# Altium PCB PCB_power.PcbDoc
Units mil, origin at the board's own origin, x right, y up, seen from the top; angles counter-clockwise.
Board outline 3346.46 x 2204.72 mil, 6 copper layers (Top Layer, Layer 1, Layer 2, Layer 3, Layer 4, Bottom Layer), stack 32.112 mil thick; 144 components, 95 nets, 574 pads, 278 vias.
Unrouted connection lines stored in the file: 260.
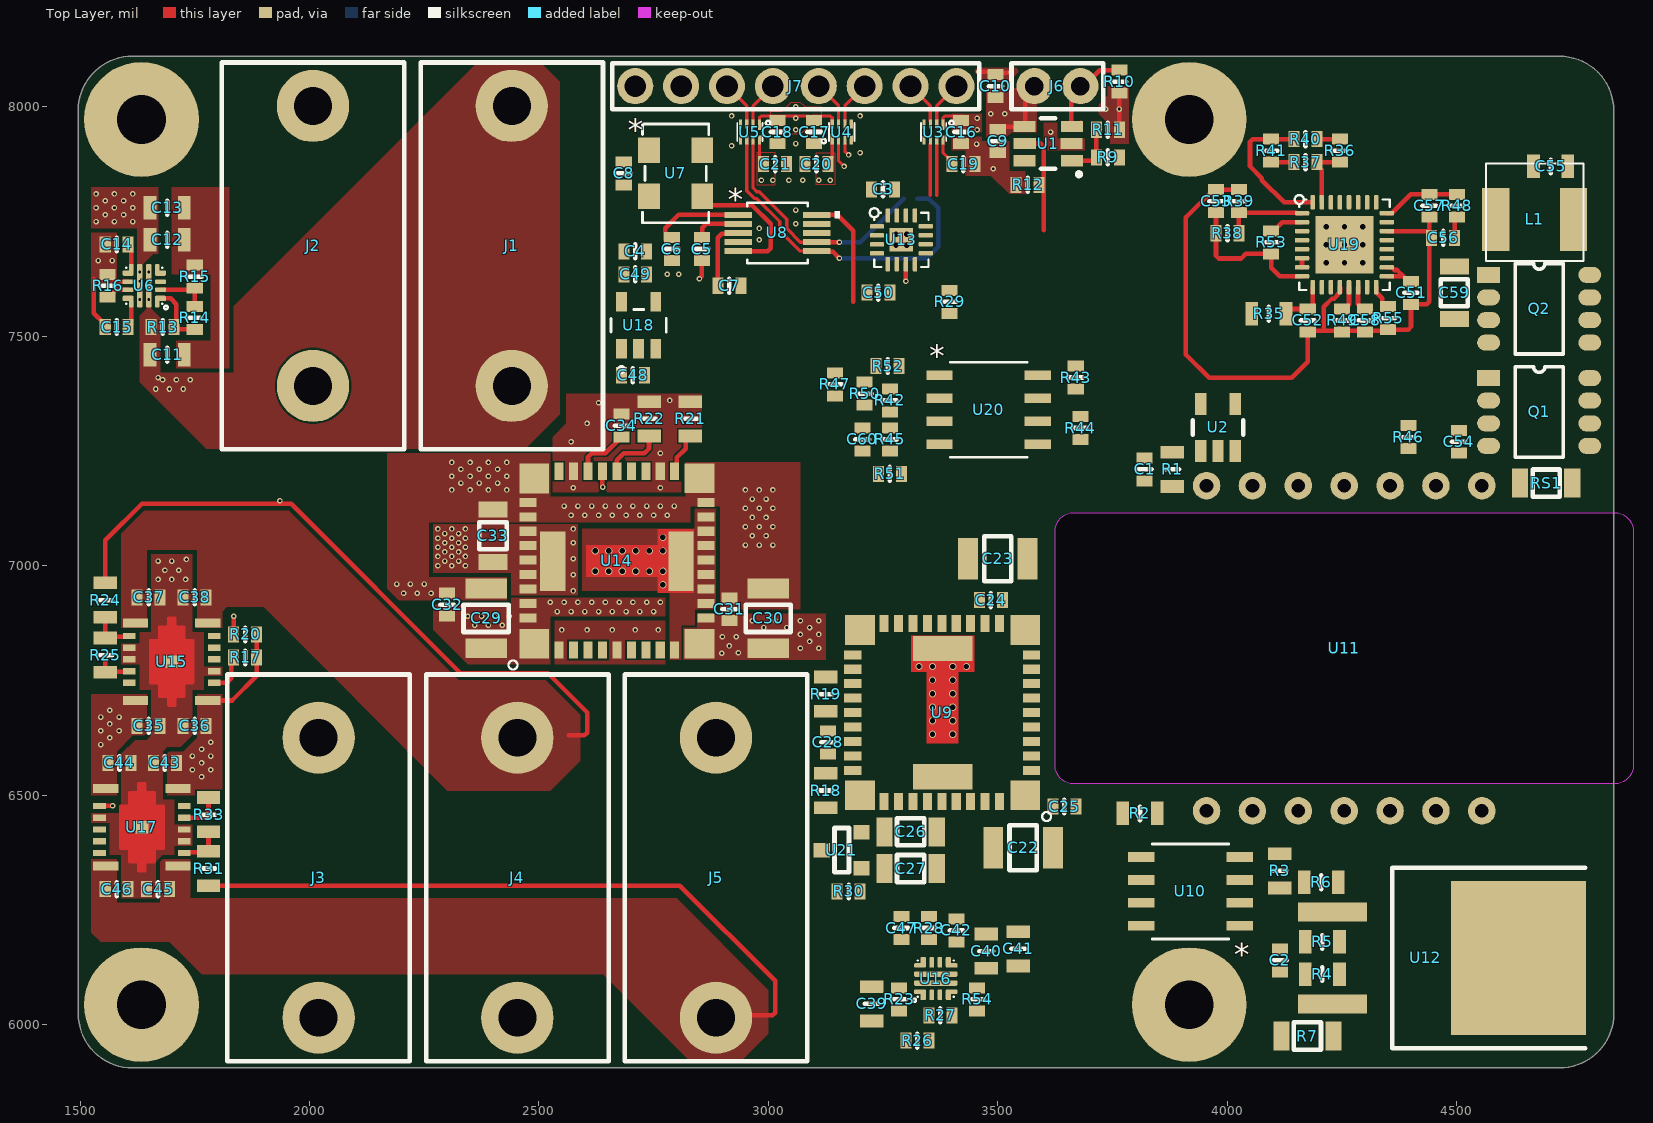
[diagram p0: Top Layer view]
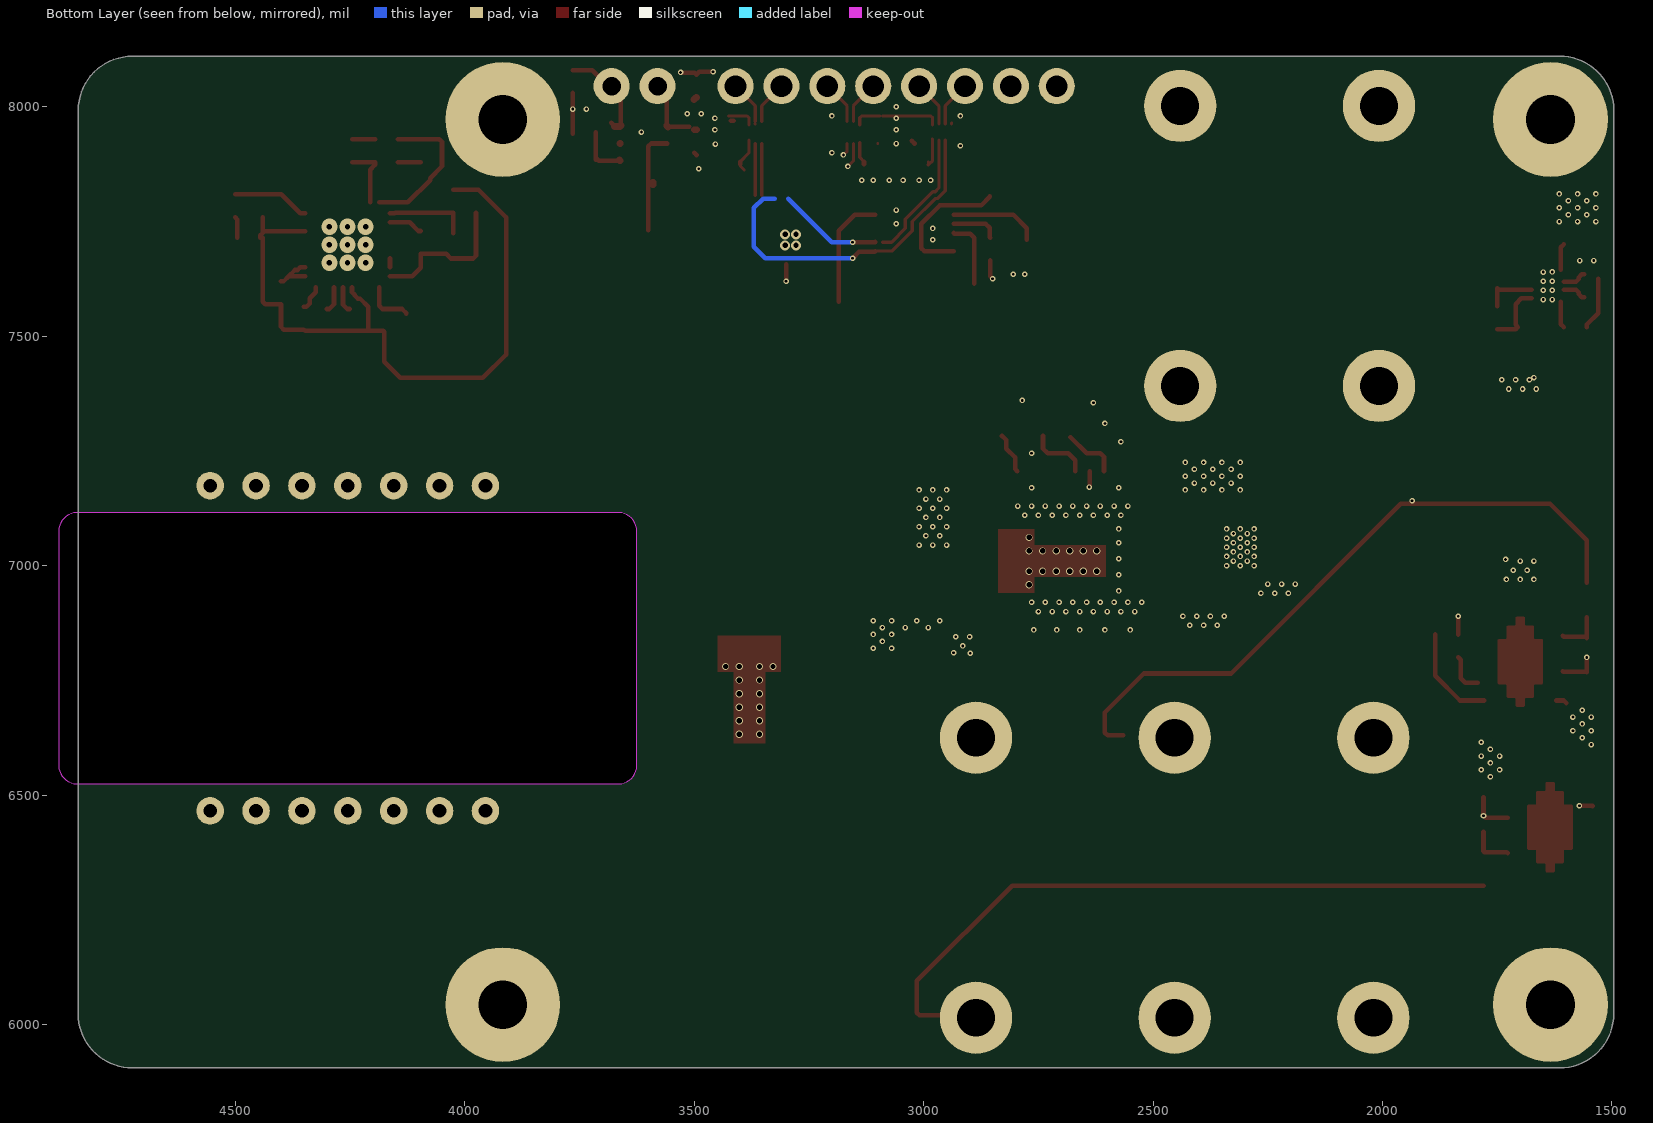
[diagram p1: Bottom Layer view, seen from below]

## Layer stack, top to bottom
Top Solder: solder mask 0.4, Solder Resist, Dk 3.5
Top Layer: signal copper 1.4
Dielectric 1: prepreg 2.8, PP-006, Dk 4.1
Layer 1: signal copper 1.378
Dielectric 2: prepreg 2.8, PP-006, Dk 4.1
Layer 2: signal copper 1.378
Dielectric 3: dielectric 12.6, FR-4, Dk 4.8
Layer 3: signal copper 1.378
Dielectric 4: prepreg 2.8, PP-006, Dk 4.1
Layer 4: signal copper 1.378
Dielectric 5: prepreg 2.8, PP-006, Dk 4.1
Bottom Layer: signal copper 1.4
Bottom Solder: solder mask 0.4, Solder Resist, Dk 3.5

## Board outline
1496.06,6023.62 1496.06,7992.13 cw(c1614.17,7992.13) 1614.17,8110.24 4724.41,8110.24 cw(c4724.41,7992.13) 4842.52,7992.13 4842.52,6023.62 cw(c4724.41,6023.62) 4724.41,5905.51 1614.17,5905.51 cw(c1614.17,6023.62)

## Design rules (kind name [scope] priority, off if disabled: settings)
Clearance [All] p1: gap=4 ignorepadtopadclearanceinfootprint=TRUE
HoleSize [All] p1: absolutevalues=TRUE maxlimit=100 minlimit=11.81 maxpercent=80.000 minpercent=20.000
PolygonConnect [All] p1: connectstyle=Direct reliefconductorwidth=10 reliefentries=4 polygonreliefangle="90 Angle" airgapwidth=10
RoutingVias [All] p1: holewidth=6 width=12 viastyle="Through Hole" minholewidth=6 minwidth=12 maxholewidth=50 maxwidth=100 viatemplateguid#1={191AAEB9-C5C8-47EE-9A1E-635FF2006958} viatemplatename#1=v61h30
SolderMaskExpansion [All] p1: expansion=4 istentingtop=FALSE
Width [All] p1: maxlimit=100 minlimit=4 preferedwidth=10
29 further rules are at their usual default settings.

## Classes and differential pairs
component class TECController: C51 C52 C53 C54 C55 C56 C57 C58 C59 C60 L1 Q1 Q2 R35 R36 R37 R38 R39 R40 R41 R42 R43 R44 R45 R46 R47 R48 R49 R50 R51 R52 R53 R55 RS1 U19 U20
component class Power: C11 C12 C13 C14 C15 C22 C23 C24 C25 C26 C27 C28 C29 C30 C31 C32 C33 C34 C35 C36 C37 C38 C39 C40 C41 C42 C43 C44 C45 C46 C47 C48 C49 R13 R14 R15 R16 R17 R18 R19 R20 R21 R22 R23 R24 R25 R26 R27 R28 R29 R30 R31 R33 R54 U6 U9 U14 U15 U16 U17 U18 U21
component class LaserDiode: C1 C2 R1 R2 R3 R4 R5 R6 R7 U2 U10 U11 U12
component class Control: C3 C4 C5 C6 C7 C8 C50 U7 U8 U13
component class Connectors: C9 C10 C16 C17 C18 C19 C20 C21 J1 J2 J3 J4 J5 J6 J7 R9 R10 R11 R12 U1 U3 U4 U5

## Components (designator, comment, footprint, x,y, rotation, side; value= is the part's Value field where it differs from the comment)
C1 "120pF" "0603 B" 3820,7210 r270 top
C2 "47pF" "0603 B" 4115,6140 r90 top
C3 "0.1uF" "0603 B" 3250,7820 r180 top
C4 "10uF" "0603 B" 2710,7685 r180 top
C5 "0.1uF" "0603 B" 2855,7690 r90 top
C6 "0.01uF" "0603 B" 2790,7690 r90 top
C7 "0.1uF" "0603 B" 2915,7610 r180 top
C8 "0.1uF" "0603 B" 2685,7855 r90 top
C9 "1uF" "0603 B" 3500,7925 r90 top
C10 "1uF" "0603 B" 3495,8045 r270 top
C11 "1uF" "0805 B" 1690,7460 r180 top
C12 "4.7uF" "0805 B" 1690,7710 r180 top
C13 "4.7uF" "0805 B" 1690,7780 r180 top
C14 "3.3nF" "0603 B" 1580,7700 r0 top
C15 "1nF" "0603 B" 1580,7520 r0 top
C16 "1uF" "0603 B" 3420,7945 r90 top
C17 "1uF" "0603 B" 3100,7945 r90 top
C18 "1uF" "0603 B" 3020,7945 r90 top
C19 "1uF" "0603 B" 3425,7875 r180 top
C20 "1uF" "0603 B" 3105,7875 r0 top
C21 "1uF" "0603 B" 3015,7875 r180 top
C22 "22uF" 1210 3555.04,6385 r180 top
C23 "22uF" 1210 3500,7015 r0 top
C24 "100nF" "0603 B" 3485,6925 r0 top
C25 "100nF" "0603 B" 3645,6475 r180 top
C26 "100uF" "1206 B" 3310,6420 r0 top
C27 "100uF" "1206 B" 3310,6340 r0 top
C28 "33nF" "0603 B" 3130,6615 r90 top
C29 "22uF" 1210 2385,6885 r270 top
C30 "22uF" 1210 3000,6885 r270 top
C31 "100nF" "0603 B" 2915,6905 r270 top
C32 "100nF" "0603 B" 2300,6915 r270 top
C33 "100uF" "1206 B" 2400,7065 r270 top
C34 "33nF" "0603 B" 2680,7305 r270 top
C35 "10uF" "0603 B" 1649.63,6650.79 r180 top
C36 "10uF" "0603 B" 1749.63,6650.79 r0 top
C37 "47uF" "0603 B" 1649.63,6930.79 r180 top
C38 "47uF" "0603 B" 1749.63,6930.79 r0 top
C39 "1uF" "0805 B" 3225,6045 r90 top
C40 "4.7uF" "0805 B" 3475,6160 r270 top
C41 "4.7uF" "0805 B" 3545,6165 r270 top
C42 "18nF" "0603 B" 3410,6205 r270 top
C43 "10uF" "0603 B" 1685,6570 r0 top
C44 "10uF" "0603 B" 1586,6570 r180 top
C45 "47uF" "0603 B" 1670,6295 r0 top
C46 "47uF" "0603 B" 1580,6295 r180 top
C47 "1nF" "0603 B" 3289.8,6210.32 r270 top
C48 "1uF" "0603 B" 2705,7415 r180 top
C49 "1uF" "0603 B" 2710,7635 r180 top
C50 "0.1uF" "0603 B" 3240,7595 r0 top
C51 "100nF" "0603 B" 4400.63,7594.37 r270 top
C52 "100nF" "0603 B" 4175.63,7534.37 r270 top
C53 "100nF" "0603 B" 3975.63,7794.37 r90 top
C54 "100nF" "0603 B" 4505,7270 r270 top
C55 "47uF" "0805 B" 4705,7870 r0 top
C56 "4.7nF" "0603 B" 4470.63,7714.37 r180 top
C57 "100pF" "0603 B" 4440.63,7784.37 r270 top
C58 "100nF" "0603 B" 4300.63,7534.37 r90 top
C59 "68uF" "1206 B" 4495,7595 r270 top
C60 "100nF" "0603 B" 3205,7275 r90 top
J1 "24.243.1" "BANANA RD" 2440.94,7696.85 r90 top
J2 "24.243.2" "BANANA BK" 2007.87,7696.85 r90 top
J3 "24.243.2" "BANANA BK" 2020,6319.88 r270 top
J4 "24.243.3" "BANANA YL" 2453.07,6319.88 r270 top
J5 "24.243.5" "BANANA BU" 2886.14,6319.88 r270 top
J6 "SIL02" SIL02 3630,8045 r180 top
J7 "SIL08" SIL08 3060,8045 r0 top
L1 "3.3uH" SRP0520 4670,7770 r180 top
Q1 "FDS8960C" SO-8 4680,7335 r0 top
Q2 "FDS8960C" SO-8 4680,7560 r0 top
R1 "124" 0805 3880,7210 r270 top
R2 "62K" 0805 3810,6460 r180 top
R3 "3.9K" 0805 4115,6335 r90 top
R4 "1k" 0805 4207.4,6110 r180 top
R5 "10" 0805 4207.4,6180 r180 top
R6 "10k" 0805 4205,6310 r180 top
R7 "0.025" 1206 4175,5975 r0 top
R9 "18k" 0603 3739.94,7889.94 r0 top
R10 "18k" 0603 3765,8055 r90 top
R11 "174k" 0603 3739.94,7949.94 r0 top
R12 "18k" 0603 3565,7830 r0 top
R13 "174k" 0603 1680,7520 r180 top
R14 "3k3" 0603 1750,7540 r90 top
R15 "18k" 0603 1750,7630 r90 top
R16 "820R" 0603 1560,7610 r90 top
R17 "0" 0603 1860,6800 r0 top
R18 "169k" 0805 3125,6510 r90 top
R19 "536" 0805 3125,6720 r90 top
R20 "0" 0603 1860,6850 r0 top
R21 "63.4k" 0805 2830,7320 r90 top
R22 "196" 0805 2740,7320 r90 top
R23 "6.2k" 0603 3285,6055 r90 top
R24 "10k" 0805 1555,6925 r270 top
R25 "2.5k" 0805 1555,6805 r270 top
R26 "10k" 0603 3325,5965 r0 top
R27 "15k" 0603 3375,6020 r0 top
R28 "530" 0603 3349.8,6210.32 r90 top
R29 "10k" 0603 3395,7575 r90 top
R30 "10k" 0603 3175,6290 r180 top
R31 "10k" 0805 1780,6340 r90 top
R33 "2.32k" 0805 1780,6457.4 r90 top
R35 "5" 0805 4090.63,7549.37 r180 top
R36 "3k" 0603 4245.63,7904.37 r90 top value=6k
R37 "2k" 0603 4170.63,7879.37 r0 top value=4k
R38 "1k" 0603 4000.63,7724.37 r180 top
R39 "9k" 0603 4025.63,7794.37 r270 top
R40 "10k" 0603 4170.63,7929.37 r0 top
R41 "10k" 0603 4095.63,7904.37 r90 top
R42 "30k" 0603 3265,7360 r90 top
R43 "510" 0603 3670,7410 r90 top
R44 "20k" 0603 3680,7300 r270 top
R45 "20k" 0603 3265,7275 r90 top
R46 "1k" 0603 4395,7280 r90 top
R47 "510" 0603 3145,7395 r90 top
R48 "4.75k" 0603 4500.63,7784.37 r270 top
R49 "249 kΩ" 0603 4250.63,7534.37 r90 top value=249k
R50 "30k" 0603 3210,7375 r270 top
R51 "6.8k" 0603 3265,7200 r180 top
R52 "10k" 0603 3260,7435 r180 top
R53 "10k" 0603 4095.63,7704.37 r270 top
R54 "100k" 0603 3455,6055 r270 top
R55 "100k" 0603 4350.63,7539.37 r90 top
RS1 "0.01" 1206 4695,7180 r0 top
U1 "LT1719 SOT" TSOT-23-6 3610,7919.88 r90 top
U2 "AD8031" TSOT-23-5 3980,7301.18 r0 top
U3 "SN74AVC2T244" "X2SON 8" 3360,7945 r180 top
U4 "SN74AVC2T244" "X2SON 8" 3160,7945 r0 top
U5 "SN74AVC2T244" "X2SON 8" 2960,7945 r180 top
U6 "TPS259470L" "VQFN-HR 2x2" 1640,7610 r180 top
U7 "7C-25.000MCB-T" OSC_TXC_7C_TXC 2798,7855 r0 top
U8 "AD9833BRMZ" RM_10_ADI 3020,7725 r0 top
U9 "LMZ31707RVQT" PB3QFN 3380,6679.76 r90 top value=Value
U10 "LT1677CS8#PBF" SO-8_S_LIT 3920,6290 r180 top
U11 "EM33X" AC1409 4255,6820 r0 top
U12 "CSD18511KTT" DPAK 4635,6145 r270 top
U13 "AD5592RBCPZ-1-RL7" "LFCSP CP 16 2" 3290,7710 r0 top
U14 "LMZ31707RVQT" PB3QFN 2670,7010 r0 top value=Value
U15 "TPSM53603RDAR" RDA0015A 1699.63,6790.79 r180 top value=Value
U16 "TPS259470L" "VQFN-HR 2x2" 3365,6100.16 r90 top
U17 "TPSM53603RDAR" RDA0015A 1635,6430 r0 top value=Value
U18 "TPS7A0533PDBVT" DBV0005A-MFG 2717.4,7523.82 r90 top value=Value
U19 "ADN8831ACPZ-REEL7" "LFCSP CP 32 7" 4255.63,7699.37 r0 top
U20 "LT1677CS8#PBF" SO-8_S_LIT 3480,7340 r0 top
U21 "DMN3150L" SOT-23 3160,6380 r180 top

## Footprints (in the part's own frame and the unit in brackets; to place one, negate y for a bottom-side part, rotate by r counter-clockwise, add the part's x,y. Pads: shape width x height; smd on the part's side, far side on the other; paste and mask are expansions set on the pad)
0603 [mil] "SMD 0603"
  rect 24x35 smd: 1(-25,0) 2(25,0)
  silkscreen extent 0,-15 0,15, body extent -31,-16 31,16, height 18
"0603 B" [mil] "SMD 0603 blue"
  rect 24x35 smd: 1(-25,0) 2(25,0)
  silkscreen extent 0,-15 0,15, body extent -31,-16 31,16, height 18
0805 [mm] "SMD 0805"
  rect 0.7x1.3 smd: 1(-0.95,0) 2(0.95,0)
  silkscreen extent 0,-0.38 0,0.38, body extent -1,-0.6 1,0.6, height 1.1
"0805 B" [mm] "SMD 0805 blue"
  rect 0.7x1.3 smd: 1(-0.95,0) 2(0.95,0)
  silkscreen extent 0,-0.38 0,0.38, body extent -1,-0.6 1,0.6, height 1.25
1206 [mil] "SMD 1206"
  rect 35x63 smd: 1(-57,0) 2(57,0)
  silkscreen extent -30,-30 30,30, body extent -60,-30 60,30, height 18
"1206 B" [mil] "SMD 1206"
  rect 35x63 smd: 1(-57,0) 2(57,0)
  silkscreen extent -30,-30 30,30, body extent -60,-30 60,30, height 45
1210 [mm] "SMD 1210"
  rect 1.1x2.3 smd: 1(-1.65,0) 2(1.65,0)
  silkscreen extent -0.75,-1.25 0.75,1.25, body extent -1.6,-1.25 1.6,1.25, height 1.3
AC1409 [mil] "Butterfly for GH High Power DFB Laser"
  round 60 hole 30: 1(300,354.33) 2(200,354.33) 3(100,354.33) 4(0,354.33) 5(-100,354.33) 6(-200,354.33) 7(-300,354.33) 8(-300.01,-354.34) 9(-200.01,-354.34) 10(-100.01,-354.34) 11(-0.01,-354.34) 12(99.99,-354.34) 13(199.99,-354.34) 14(299.99,-354.34)
  Keep-Out Layer board cut-out: -629.92,255.91 -626.92,270.97 -618.39,283.74 -605.62,292.28 -590.55,295.28 -590.55,295.28 590.55,295.28 605.62,292.28 618.39,283.74 626.92,270.97 629.92,255.91 629.92,255.91 629.92,-255.91 626.92,-270.97 618.39,-283.74 605.62,-292.28 590.55,-295.28 590.55,-295.28 -590.55,-295.28 -605.62,-292.28 -618.39,-283.74 -626.92,-270.97 -629.92,-255.91 -629.92,-255.91
  Multi-Layer pour cut-out: -649.61,255.91 -645.11,278.5 -632.31,297.66 -613.15,310.47 -590.55,314.96 -590.55,314.96 590.55,314.96 613.15,310.47 632.31,297.66 645.11,278.5 649.61,255.91 649.61,255.91 649.61,-255.91 645.11,-278.5 632.31,-297.66 613.15,-310.47 590.55,-314.96 590.55,-314.96 -590.55,-314.96 -613.15,-310.47 -632.31,-297.66 -645.11,-278.5 -649.61,-255.91 -649.61,-255.91
  body extent -590,-274 1256,274, height 281
"BANANA BK" [mm] "Multicomp 24.243.2"
  round 4 hole 2.1: 1(-7.75,0) 1(7.75,0)
  silkscreen extent -11.25,-5.05 10.15,5.05, body extent -11.25,-5.05 12.75,5.05, height 13
"BANANA BU" [mm] "Multicomp 24.243.5"
  round 4 hole 2.1: 1(-7.75,0) 1(7.75,0)
  silkscreen extent -11.25,-5.05 10.15,5.05, body extent -11.25,-5.05 12.75,5.05, height 13
"BANANA RD" [mm] "Multicomp 24.243.1"
  round 4 hole 2.1: 1(-7.75,0) 1(7.75,0)
  silkscreen extent -11.25,-5.05 10.15,5.05, body extent -11.25,-5.05 12.75,5.05, height 13
"BANANA YL" [mm] "Multicomp 24.243.3"
  round 4 hole 2.1: 1(-7.75,0) 1(7.75,0)
  silkscreen extent -11.25,-5.05 10.15,5.05, body extent -11.25,-5.05 12.75,5.05, height 13
DBV0005A-MFG [mm]
  rect 1.1x0.6 smd paste+0 mask+0: 1(-1.3,0.95) 2(-1.3,0) 3(-1.3,-0.95) 4(1.3,-0.95) 5(1.3,0.95)
  silkscreen extent -2.57,-1.53 0.87,1.53, body extent -1.4,-1.45 1.4,1.45, height 1.2
DPAK [mm] "DPAK power transistor"
  rect 1.05x3.82 smd: 1(-2.54,-10.3) 3(2.54,-10.3)
  rect 8.55x7.48 smd paste-100: 2(0,0)
  silkscreen extent -5,-7 5,3.68, body extent -5,-11.99 5,3.68, height 4.78
"LFCSP CP 16 2" [mm] "Analog devive package LFCSP CP 16 2"
  rrect50% 0.8x0.25 smd: 1(-1.35,0.75) 2(-1.35,0.25) 3(-1.35,-0.25) 4(-1.35,-0.75) 9(1.35,-0.75) 10(1.35,-0.25) 11(1.35,0.25) 12(1.35,0.75)
  rrect50% 0.25x0.8 smd: 5(-0.75,-1.35) 6(-0.25,-1.35) 7(0.25,-1.35) 8(0.75,-1.35) 13(0.75,1.35) 14(0.25,1.35) 15(-0.25,1.35) 16(-0.75,1.35)
  rect 1.3x1.3 smd paste-0.1: 17(0,0)
  silkscreen extent -1.75,-1.5 1.5,1.75, body extent -1.51,-1.51 1.51,1.51, height 0.97
"LFCSP CP 32 7" [mm] "Analog devive package LFCSP CP 32 7"
  rrect50% 0.8x0.25 smd: 1(-2.35,1.75) 2(-2.35,1.25) 3(-2.35,0.75) 4(-2.35,0.25) 5(-2.35,-0.25) 6(-2.35,-0.75) 7(-2.35,-1.25) 8(-2.35,-1.75) 17(2.35,-1.75) 18(2.35,-1.25) 19(2.35,-0.75) 20(2.35,-0.25) 21(2.35,0.25) 22(2.35,0.75) 23(2.35,1.25) 24(2.35,1.75)
  rrect50% 0.25x0.8 smd: 9(-1.75,-2.35) 10(-1.25,-2.35) 11(-0.75,-2.35) 12(-0.25,-2.35) 13(0.25,-2.35) 14(0.75,-2.35) 15(1.25,-2.35) 16(1.75,-2.35) 25(1.75,2.35) 26(1.25,2.35) 27(0.75,2.35) 28(0.25,2.35) 29(-0.25,2.35) 30(-0.75,2.35) 31(-1.25,2.35) 32(-1.75,2.35)
  rect 3.2x3.2 smd paste-0.25: Pad(0,0)
  silkscreen extent -2.75,-2.5 2.5,2.75, body extent -2.5,-2.51 2.52,2.51, height 0.89
OSC_TXC_7C_TXC [mm]
  rect 1.2x1.4 smd paste+0 mask+0: 1(-1.473,1.27) 2(-1.473,-1.27) 3(1.473,-1.27) 4(1.473,1.27)
  silkscreen extent -1.83,-2.73 1.83,2.73, body extent 0,0 0.25,0.25, height 0.25
PB3QFN [mm] "QFN42 for the LMZ317xx"
  rect 1.65x1.64 smd paste-0.25 mask+0.05: 1(-4.575,-4.575) 21(4.575,4.575)
  rect 0.5x0.95 smd paste-0.025 mask+0.05: 2(-3.2,-4.925) 3(-2.4,-4.925) 4(-1.6,-4.925) 5(-0.8,-4.925) 6(0,-4.925) 7(0.8,-4.925) 8(1.6,-4.925) 9(2.4,-4.925) 10(3.2,-4.925) 22(3.2,4.975) 23(2.4,4.975) 24(1.6,4.975) 25(0.8,4.975) 26(0,4.975) 27(-0.8,4.975) 28(-1.6,4.975) 29(-2.4,4.975) 30(-3.2,4.975)
  rect 1.64x1.65 smd paste-0.25 mask+0.05: 11(4.575,-4.575) 31(-4.575,4.575)
  rect 0.95x0.5 smd paste-0.025 mask+0.05: 12(4.925,-3.15) 13(4.925,-2.35) 14(4.925,-1.55) 15(4.925,-0.75) 16(4.925,0.05) 17(4.925,0.85) 18(4.925,1.65) 19(4.925,2.45) 20(4.925,3.25) 32(-4.925,3.25) 33(-4.925,2.45) 34(-4.925,1.65) 35(-4.925,0.85) 36(-4.925,0.05) 37(-4.925,-0.75) 38(-4.925,-1.55) 39(-4.925,-2.35) 40(-4.925,-3.15)
  rect 1.4x3.29 smd paste-10 mask+0.05: 41(-3.55,0) 42(3.55,0)
  Top Layer region: -1.7,-0.262 4.25,-0.262 4.25,0.263 -1.7,0.263
  Top Layer region: -1.7,0.875 -1.7,-0.875 2.25,-0.875 2.25,-1.75 4.25,-1.75 4.25,1.75 2.25,1.75 2.25,0.875
  silkscreen extent -6,-6 -5.5,-5.5, body extent -5,-5 5,5, height 3.4
RDA0015A [mm]
  rect 1.4x0.5 smd paste+0 mask+0.051: 1(-2,2.15) 7(-2,-2.15) 8(2,-2.15) 14(2,2.15)
  rect 0.7x0.35 smd paste+0 mask+0.051: 2(-2.35,1.175) 3(-2.35,0.525) 4(-2.35,-0.125) 5(-2.35,-0.775) 6(-2.35,-1.425) 9(2.35,-1.425) 10(2.35,-0.775) 11(2.35,-0.125) 12(2.35,0.525) 13(2.35,1.175)
  rect 0.7x0.7 smd paste-0.337 mask+0.051: 15(0,0)
  Top Layer region: -1.25,-1.2 -1.2,-1.25 -0.8,-1.25 -0.75,-1.3 -0.75,-1.95 -0.7,-2 -0.3,-2 -0.25,-2.05 -0.25,-2.449 -0.2,-2.499 0.2,-2.499 0.25,-2.449 0.25,-2.05 0.3,-2 0.7,-2 0.75,-1.95 0.75,-1.3 0.8,-1.25 1.2,-1.25 1.25,-1.2 1.25,1.2 1.2,1.25 0.8,1.25 0.75,1.3 0.75,1.95 0.7,2 0.3,2 0.25,2.05 0.25,2.449 0.2,2.499 -0.2,2.499 -0.25,2.449 -0.25,2.05 -0.3,2 -0.7,2 -0.75,1.95 -0.75,1.3 -0.8,1.25 -1.2,1.25 -1.25,1.2
  body extent -2.47,-2.75 2.53,2.75, height 4.1
RM_10_ADI [mil]
  rect 59.56x13 smd paste+0 mask+0: 1(-85.5,39.37) 2(-85.5,19.69) 3(-85.5,0) 4(-85.5,-19.69) 5(-85.5,-39.37) 6(85.5,-39.37) 7(85.5,-19.69) 8(85.5,0) 9(85.5,19.69) 10(85.5,39.37)
  silkscreen extent -66,-66 135,66, body extent -101,-61 101,61, height 43
SIL02 [mm] "1x2 2.54mm header"
  round 2 hole 1.02: 1(-1.27,0) 2(1.27,0)
  silkscreen extent -2.54,-1.27 2.54,1.27, body extent -2.54,-1.27 2.54,1.27, height 8.38
SIL08 [mm] "8x1 2.54mm header"
  round 2 hole 1.2: 1(-8.89,0) 2(-6.35,0) 3(-3.81,0) 4(-1.27,0) 5(1.27,0) 6(3.81,0) 7(6.35,0) 8(8.89,0)
  silkscreen extent -10.16,-1.27 10.16,1.27, body extent -10.16,-1.27 10.16,1.27, height 8.38
SO-8 [mm] "SO-8 large pads"
  rect 1.27x0.89 smd: 1(-2.8,1.875)
  oval 1.27x0.89 smd: 2(-2.8,0.623) 3(-2.8,-0.629) 4(-2.8,-1.881) 5(2.8,-1.881) 6(2.8,-0.629) 7(2.8,0.623) 8(2.8,1.875)
  silkscreen extent -1.33,-2.51 1.33,2.5, body extent -3,-2.45 3,2.45, height 1.7
SO-8_S_LIT [mil]
  rect 57.28x20.97 smd paste+0 mask+0: 1(-107.14,75) 2(-107.14,25) 3(-107.14,-25) 4(-107.14,-75) 5(107.14,-75) 6(107.14,-25) 7(107.14,25) 8(107.14,75)
  silkscreen extent -84,-104 84,104, body extent -122,-99 122,99, height 69
SOT-23 [mm] "SOT-23 made for BAR66E6327"
  rect 0.9x0.8 smd: 1(-1.1,1) 2(-1.1,-1) 3(1.1,0)
  silkscreen extent -0.4,-1.22 0.4,1.22, body extent -1.4,-1.45 1.4,1.45, height 1
SRP0520 [mm] "Bourns SRP0520 series"
  rect 1.5x3.5 smd: 1(-2.15,0.39) 2(2.15,0.39)
  silkscreen extent -2.7,-2.7 2.7,2.7, body extent -2.55,-2.7 2.55,2.4, height 2
TSOT-23-5 [mm] "TSOT-23-5"
  rect 0.62x1.22 smd: 1(-0.95,-1.31) 2(0,-1.3) 3(0.95,-1.31) 4(0.95,1.31) 5(-0.95,1.31)
  silkscreen extent -1.4,-0.4 1.4,0.4, body extent -1.45,-1.6 1.45,1.6, height 0.94
TSOT-23-6 [mm] "TSOT-23-6"
  rect 0.62x1.22 smd: 1(-0.95,-1.31) 2(0,-1.3) 3(0.95,-1.31) 4(0.95,1.31) 5(0,1.3) 6(-0.95,1.31)
  silkscreen extent -1.8,-1.8 1.4,0.4, body extent -1.45,-1.42 1.45,1.4, height 1
"VQFN-HR 2x2" [mm] "Texas Instrument VQFN-HR"
  rrect50% 0.6x0.275 on Top Paste paste-10 mask+0.05: 1(-0.9,0.687) 4(-0.9,-0.687) 7(0.9,-0.687) 10(0.9,0.687)
  rrect50% 0.6x0.3 smd paste-10 mask+0.05: 1(-0.9,0.7) 4(-0.9,-0.7) 7(0.9,-0.7) 10(0.9,0.7)
  rrect50% 0.25x0.65 smd paste-10 mask+0.05: 1(-0.725,0.875) 4(-0.725,-0.875) 7(0.725,-0.875) 10(0.725,0.875)
  rrect50% 0.225x0.65 on Top Paste paste-10 mask+0.05: 1(-0.713,0.875) 4(-0.713,-0.875) 7(0.713,-0.875) 10(0.713,0.875)
  rrect50% 0.6x0.25 smd mask+0.05: 2(-0.9,0.225) 3(-0.9,-0.225) 8(0.9,-0.225) 9(0.9,0.225)
  rrect50% 0.28x1.06 on Top Paste mask+0.05: 5(-0.25,0.63) 5(-0.25,-0.63) 6(0.25,0.63) 6(0.25,-0.63)
  rrect50% 0.3x2.4 smd paste-10 mask+0.05: 5(-0.25,0) 6(0.25,0)
  silkscreen extent -1.3,-1 1,1.3, body extent -1,-1 1,1, height 1
"X2SON 8" [mm] "Texas Instrument package DQE"
  rect 0.175x0.6 smd mask+0.05: 1(-0.525,-0.4)
  rect 0.175x0.5 smd mask+0.05: 2(-0.175,-0.45) 3(0.175,-0.45) 4(0.525,-0.45) 5(0.525,0.45) 6(0.175,0.45) 7(-0.175,0.45) 8(-0.525,0.45)
  silkscreen extent -1.13,-0.62 0.7,0.5, body extent -0.7,-0.5 0.7,0.5, height 0.37

## Part data
C1 C2 C3 C4 C5 C6 C7 C8 C14 C15 C24 C25 C28 C31 C32 C34 C35 C36 C37 C38 C42 C43 C44 C45 C46 C47 C48 C49 C50 C51 C52 C53 C54 C56 C57 C58 C60: library part "CAP 0603", "603 Capacitor"
C9 C10 C16 C17 C18 C19 C20 C21: library part "CAP 0603", "603 Capacitor", Rating=X7R, Voltage=10V, Ref=C1608X7R1E105M080AB
C11 C12 C13 C39 C40 C41: library part "CAP 0805", "805 Capacitor", Voltage=35V, Type=X7R
C22 C23 C29 C30: library part "CAP 1210", "1210 Capacitor"
C26 C27 C33 C59: library part "CAP 1206", "1206 Capacitor"
C55: library part "CAP 0805", "805 Capacitor"
J1: library part "BANANA RED", "Banana jack, PCB mount right angle", Ref=24.243.1
J2 J3: library part "BANANA BLACK", "Banana jack, PCB mount right angle", Ref=24.243.2
J4: library part "BANANA YELLOW", "Banana jack, PCB mount right angle", Ref=24.243.3
J5: library part "BANANA BLUE", "Banana jack, PCB mount right angle", Ref=24.243.5
J6: "2.54mm Header 1x2", Ref="4x1 2.54MM HEADER"
J7: "2.54mm Header 1x6", Ref="4x1 2.54MM HEADER"
L1: library part "IND 3.3uH 4.8A SMD", "Bourns SRP0520 3.3uH 4.8A Inductor", Ref=IHLP3232DZER330M11
Q1 Q2: "MOSFET pair"
R1 R2 R3 R4 R5 R6 R18 R19 R21 R22 R24 R25 R31 R33 R35: library part "RES 0805", "805 Resistor"
R7 RS1: library part "RES 1206", "1206 Resistor"
R9 R10 R11 R12 R13 R14 R15 R16 R17 R20 R23 R26 R27 R28 R29 R30 R36 R37 R38 R39 R40 R41 R42 R43 R44 R45 R46 R47 R48 R49 R50 R51 R52 R53 R54 R55: library part "RES 0603", "603 Resistor"
U1: "4.5ns Comparator with rail-torail output", Ref=LT1719IS6#PBF
U2: "2.7V, 800 uA, 80 MHz Rail-to-Rail I/O Amplifiers", Supplier Part Number 1=AD8031ARTZ-REEL7CT-ND, Ref=AD8031, Supplier 1=Digi-Key
U3 U4 U5: "2-bit dual-supply non-inverting bus translator", Ref=SN74AVC2T244
U6 U16: "2.7-23 V, 5.5 A, 28 mΩ True Reverse Current Blocking eFuse with Input Reverse Polarity Protection", Ref=TPS259470L
U7: "25 MHz XO (Standard) CMOS Oscillator 2.5V Enable/Disable 4-SMD, No Lead", Supplier Part Number 1=887-1442-1-ND, Built_By=EMA_UL_Team, ComponentLink1Description="New link", Copyright="Copyright (C) 2021 Accelerated Designs. All rights reserved", Manufacturer_Part_Number=7C-25.000MCB-T, RefDes=RefDes, SourceLibrary=TXC_2011-01-01_OSC_7C, Supplier 1=Digi-Key, Type=DEV, Vendor=TXC
U8: "Low Power, 12.65 mW, 2.3 V to 5.5 V, Programmable Waveform Generator", Supplier Part Number 1=AD9833BRMZ-REEL7CT-ND, Built_By=EMA_UL_Team, Copyright="Copyright (C) 2018 Accelerated Designs. All rights reserved", Manufacturer_Part_Number=AD9833BRMZ, RefDes=RefDes, SourceLibrary=Analog_2015-12-15, Supplier 1=Digi-Key, Type=DEV, Vendor="Analog Devices Inc"
U9 U14: "Non-Isolated DC/DC Converters 7A Power Module w/ 2.95V-17V Input", Manufacturer="Texas Instruments", PartNumber=LMZ31707RVQR, Supplier Part Number 1=296-37136-1-ND, Copyright="Copyright (C) 2018 Accelerated Designs. All rights reserved", RefDes=RefDes, Supplier 1=Digi-Key, Type=DEV
U10 U20: "Low Noise, Rail-to-Rail Precision Op Amp", Supplier Part Number 1=LT1677CS8#PBF-ND, Built_By=EMA_UL_Team, Copyright="Copyright (C) 2018 Accelerated Designs. All rights reserved", Manufacturer_Part_Number=LT1677CS8#PBF, RefDes=RefDes, SourceLibrary=LinearTech_2016-05-13_8, Supplier 1=Digi-Key, Type=DEV, Vendor="Linear Technology"
U11: "5W Cooled 9XX Multimode Lasers in 14-Pin Package"
U12: "40-V, N channel NexFET™ power MOSFET, single D2PAK, 2.6 mOhm", Supplier Part Number 1=296-50718-1-ND, Built_By=EMA_Jessica, Copyright="Copyright (C) 2018 Accelerated Designs. All rights reserved", Manufacturer_Part_Number=CSD18511KTT, RefDes=RefDes, SourceLibrary=TI_2019-05-10, Supplier 1=Digi-Key, Type=DEV, Vendor="Texas Instruments"
U13: "8-Channel, 12-Bit, Configurable ADC/DAC with On-Chip Reference, SPI Interface, LFCSP", Supplier Part Number 1=AD5592RBCPZ-1-RL7CT-ND, Built_By=EMA_UL_Team, Copyright="Copyright (C) 2021 Accelerated Designs. All rights reserved", Manufacturer_Part_Number=AD5592RBCPZ-1-RL7, RefDes=RefDes, SourceLibrary=Analog_2015-12-15, Supplier 1=Digi-Key, Type=DEV, Vendor="Analog Devices Inc"
U15 U17: "36-V, 3-A step-down power module in small 5.5 x 5 x 4-mm Enhanced HotRod™ QFN with simple footprint", Manufacturer="Texas Instruments", Supplier Part Number 1=296-TPSM53603RDARCT-ND, Copyright="Copyright (C) 2018 Accelerated Designs. All rights reserved", PartNumber=TPSM53603RDAR, RefDes=RefDes, Supplier 1=Digi-Key, Type=DEV
U18: "Linear Voltage Regulator IC Positive Fixed 1 Output 200mA SOT-23-5", Manufacturer="Texas Instruments", PartNumber=TPS7A2050PDBVR, Supplier Part Number 1=296-50256-1-ND, Copyright="Copyright (C) 2021 Accelerated Designs. All rights reserved", RefDes=RefDes, Supplier 1=Digi-Key, Type=DEV
U19: "A High Efficiency TEC Controller Solution", Supplier Part Number 1=ADN8831ACPZ-REEL7CT-ND, Built_By=EMA_UL_Team, Copyright="Copyright (C) 2018 Accelerated Designs. All rights reserved", Manufacturer_Part_Number=ADN8831ACPZ-REEL7, RefDes=RefDes, SourceLibrary=Analog_2015-01-06, Supplier 1=Digi-Key, Type=DEV, Vendor="Analog Devices Inc"
U21: "Power-Transistor", Ref=DMN3150L

## Free pads (board coordinates)
  round 250 hole 106.3: MNT(1633.86,6043.31) MNT(1633.86,7972.44) MNT(3917.32,6043.31) MNT(3917.32,7972.44)

## Via types
v1: diameter 12, hole 6, Top Layer to Bottom Layer, 237 vias
v2: diameter 15.75, hole 11.81, Top Layer to Bottom Layer, 28 vias
v3: diameter 35.43, hole 11.81, Top Layer to Bottom Layer, 9 vias
v4: diameter 21.65, hole 11.81, Top Layer to Bottom Layer, 4 vias

## Nets (pads, with @x,y where several pads share a name; then routed paths per layer and width w, separated by ;. In a path a pad name is that pad's centre, name@x,y a point inside that pad or via, vN(x,y) a via of type N, cw(c..) or ccw(c..) an arc to the next point about the centre after c; other vN are vias at no path point)
2V2: C26.2 C27.2 C39.2 R23.2 R54.1 U9.27 U9.34 U9.35 U9.36 U9.37 U9.38 U9.41 U16.5@3365,6090.32
2V2R: C40.2 C41.2 R29.1 U11.10 U16.6@3365,6110
3V3: C3.1 C4.2 C5.2 C6.1 C8.2 C19.2 C20.2 C21.2 C49.2 C60.1 U2.5 U3.8 U4.1 U5.8 U7.1 U7.4 U8.2 U10.7 U13.1 U13.15 U18.5 U20.7 | length 296.6
  Top Layer w6: U5.8 2980.67,7929.67 U5.8@2981.11,7930.12 ; C21.2 C21.2@2990,7880.5 ; C19.2@3391,7862.44 3400,7871.44 C19.2
  Top Layer w7: U5.8 2980.67,7882.86 C21.2@2990,7873.53 ; C20.2@3130,7880.5 3139.33,7889.83 U4.1@3139.33,7921.54 ; U3.8 3380.67,7899.83 C19.2@3400,7880.5
  Top Layer w10: C5.2 2856.14,7716.14 2856.14,7736.14 2864.68,7744.69 U8.2 ; C20.2 C20.2@3130,7880.5 ; C19.2 C19.2@3400,7880.5
  other v1: 2780,7635 2805,7635 2985,7840 3010,7840 3110,7840 3135,7840
"3V3 IO": C16.2 C17.2 C18.2 J7.1 U3.1 U4.8 U5.1 | length 254
  Top Layer w7: U5.1 2980.67,7975.9 2984.77,7980 3025,7980 C17.2@3090,7980 ; C17.2@3095,7980 3135.23,7980 3139.33,7975.9 U4.8@3139.33,7960.75 ; U3.1 3380.67,7975.9 3384.77,7980 C16.2@3425,7980
  Top Layer w10: C16.2@3414.5,7970 C16.2
  other v1: 3060,7950 3455,7950 3060,7975 3455,7975 3060,8000
5V: C9.2 C10.2 C33.2 C48.2 C51.1 C59.2 J6.2 Q1.3 Q2.3 R9.2 R35.2 U1.4 U14.27 U14.34 U14.35 U14.36 U14.37 U14.38 U14.41 U18.1 U18.3 U19.17 U19.18 U19.23 | length 284.5
  Top Layer w10: U14.27 2638.5,7172.58 2639.25,7171.83 v1(2639.25,7171.29) ; C9.2@3511.14,7956.14 U1.4@3557.28,7956.14 ; U1.4@3560,7958.86 J6.2@3560,8044.88 ; U19.17 C51.1@4384.03,7630.47 ; U19.18 4358.82,7650.16 4364.58,7644.39 4370.11,7644.39 C51.1@4384.03,7630.47 ; C51.1 4395.13,7619.37 C51.1@4384.03,7630.47
  Top Layer w15: C9.2@3494.5,7950 C9.2 ; C10.2 3495.64,8020 C10.2@3500.14,8015.5 ; U1.4@3557.28,7956.14 U1.4 U1.4@3560,7958.86
  other v1: 2575,6945 2575,6980 2280,7000 2310,7000 2340,7000 2295,7010 2325,7010 2575,7015 2280,7020 2310,7020 2340,7020 2295,7030 2325,7030 2280,7040 2310,7040 2340,7040 2295,7050 2325,7050 2575,7050 2280,7060 2310,7060 2340,7060 2295,7070 2325,7070 2280,7080 2310,7080 2340,7080 2575,7080 3485,7985 3515,7985
5V3_EXT: C45.2 C46.2 J5.1 R31.1 U17.7 U17.8 | length 1525.2
  Top Layer w10: R31.1 2807.4,6302.6 3015,6095 3015,6025.86 3009.14,6020 2891.38,6020 J5.1@2886.14,6014.76 ; J5.1@2885,6623.86 J5.1@2886.14,6625
5V_EXT: C37.2 C38.2 J4.1 R24.1 U15.7 U15.8 | length 1450.8
  Top Layer w10: R24.1 1555,7055 1635,7135 1960,7135 2330,6765 2520,6765 2605,6680 2605,6635.86 2599.14,6630 2565,6630
  other v1: 1935.75,7141.29
12V: C12.2 C13.2 C22.2 C23.2 C24.2 C25.2 C29.2 C30.2 C31.2 C32.2 C35.2 C36.2 C43.2 C44.2 R17.2 R20.2 U6.6@1630.16,7610 U9.1 U9.3 U9.11 U9.12 U9.39 U9.40 U14.1 U14.3 U14.11 U14.12 U14.39 U14.40 U15.1 U15.14 U17.1 U17.14 | length 242.4
  Top Layer w10: U15.14@1599.63,6700.79 1604.98,6706.14 U15.14 ; U15.1 1831.14,6706.14 1885,6760 R17.2 R20.2
  other v1: 1765,6540 1745,6555 1785,6555 1765,6570 1745,6585 1785,6585 1765,6600 1545,6610 1785,6615 1565,6625 1545,6640 1585,6640 1565,6655 1545,6670 1585,6670 1565,6685 2898.76,6808.87 2935,6810 3070,6820 3110,6820 2915,6825 3090,6835 2900,6845 2930,6845 3070,6850 3110,6850 2990,6865 3040,6865 3090,6865 2360,6870 2390,6870 2420,6870 2965,6880 3015,6880 3070,6880 3110,6880 2345,6890 2375,6890 2405,6890 2435,6890 2540,6900 2570,6900 2600,6900 2630,6900 2660,6900 2690,6900 2720,6900 2750,6900 2525,6920 2555,6920 2585,6920 2615,6920 2645,6920 2675,6920 2705,6920 2735,6920 2765,6920 1630,7580 1630,7600 1630,7620 1630,7640 1535,7750 1575,7750 1615,7750 1555,7765 1595,7765 1535,7780 1575,7780 1615,7780 1555,7795 1595,7795 1535,7810 1575,7810 1615,7810
AGND: C3.2 C4.1 C5.1 C9.1 C10.1 C16.1 C17.1 C18.1 C19.1 C20.1 C21.1 C28.1 C34.1 C51.2 C52.2 C53.2 C54.1 C55.1 C56.2 C57.2 C58.1 C59.1 C60.2 J7.2 Q1.1 Q2.1 R3.2 R6.2 R7.1 R10.1 R11.2 R12.1 R18.2 R19.2 R21.2 R22.2 R25.2 R33.2 R37.1 R39.1 R41.1 R42.1 R49.1 R51.1 R52.1 R55.1 U1.2 U2.2 U2.3 U3.4 U3.5 U4.4 U4.5 U5.4 U5.5 U8.9 U9.2 U9.6 U9.23 U9.29 U10.4 U11.4 U11.6 U14.2 U14.6 U14.23 U14.29 U15.12 U17.12 U19.3 U19.12 U19.22 U19.Pad U20.4 U21.2 | length 1974.6
  Top Layer w6: U5.4@2938.89,7965.12 2939.33,7964.67 U5.4 ; C17.1@3099.88,7919.88 C17.1
  Top Layer w10: v1(1555,6800) R25.2 1556.26,6768.86 1605.85,6768.86 U15.12 ; U17.12 1775.13,6450.67 1779.46,6455 v1(1780,6455) R33.2 ; v1(2850,7625) 2850,7625.54 2855,7630.54 C5.1 ; C18.1 C18.1@3025.67,7925.67 ; v1@3453.27,7918.75 v1(3453.81,7918.75) ; v1(3459.02,8076.52) 3459.4,8076.14 3488.86,8076.14 C10.1 3499.43,8074.43 3529.43,8074.43 v1(3529.81,8074.81) ; C9.1@3495,7895 C9.1 ; U1.2@3661.06,7920 U1.2 ; R11.2@3764.94,7941.53 v1(3764.94,7994.94) 3764.94,8029.94 R10.1 ; R39.1 C53.2 3970.13,7819.37 3910.13,7759.37 3910.13,7459.87 3960.63,7409.37 4140.63,7409.37 4175.63,7444.37 C52.2 4178.13,7511.87 4210.63,7511.87 ; R41.1 R37.1 ; U19.12 4245.79,7596.18 4240.02,7590.42 4240.02,7588.82 4233.31,7582.1 4228.36,7582.1 4210.63,7564.37 4210.63,7511.87 ; U19.22 4436.6,7728.9 C56.2@4440.63,7724.87 ; C56.2@4440.63,7714.37 4440.63,7575.23 4434.77,7569.37 C51.2 4400.63,7520.23 4394.77,7514.37 R55.1 4348.13,7511.87 4210.63,7511.87 ; C57.2 C56.2@4440.63,7724.87 ; C56.2 4445.63,7719.87 C56.2@4440.63,7724.87
  Top Layer w15: U1.2 U1.2@3661.68,7920.38
  other v1: 2550,6860 2605,6860 2660,6860 2710,6860 2760,6860 2575,7170 2765,7170 2765,7245 2570,7270 2605,7310 2630,7355 2785,7360 3060,7745 3060,7775 3045,7840 3075,7840 3490,7865 3200,7900 2920,7915 3060,7920 3615,7945 2920,7980 3200,7980 3735,7995
  other v3: 4216.26,7660 4255.63,7660 4295,7660 4216.26,7699.37 4255.63,7699.37 4295,7699.37 4216.26,7738.74 4255.63,7738.74 4295,7738.74
CS0: U3.7 U13.16 | length 112.7
  Top Layer w7: 3366.89,7806.89 U3.7@3366.89,7919.57
CS1: U3.6 U8.8 | length 112.7
  Top Layer w7: 3353.11,7806.89 U3.6@3353.11,7919.57
DGND: C7.1 C8.1 C50.1 U7.2 U8.4 U13.12
  other v1: 2980,7710 2980,7735
MISO: U4.2 U13.7 | length 91.4
  Top Layer w7: U4.2@3153.11,7919.57 3153.11,7881.89 v1(3165,7870)
  Top Layer w10: U13.7 3299.92,7656.77 3299.92,7620.08 v1(3300,7620)
MOSI: U5.6 U8.6 U13.13 | length 748.5
  Top Layer w7: U5.6 2953.11,7816.89 2970,7800 2975,7800 3025,7750 3025,7730 3069.37,7685.63 U8.6
  Top Layer w10: U8.6 3107,7684.13 3140.87,7684.13 v1(3155,7670)
  Bottom Layer w10: v1(3155,7670) 3345,7670 3370,7695 3370,7780 3350,7800 3325,7800
NetC1_1: C1.1 R1.1 U2.1 U13.2
NetC1_2: C1.2 R1.2 U2.4 U11.3 U11.7
NetC2_1: C2.1 R4.2 U10.2
NetC2_2: C2.2 R5.2 U10.6
NetC6_2: C6.2 U8.1 | length 196.7
  Top Layer w10: C6.2@2775,7710 2775,7735 2804.37,7764.37 U8.1
NetC7_2: C7.2 U8.3 | length 148.6
  Top Layer w10: C7.2@2890,7615 2890,7715 2898.5,7723.5 2933,7723.5 U8.3
NetC14_2: C14.2 U6.7@1604.57,7637.57 U6.7@1611.46,7644.46 | length 58.2
  Top Layer w10: C14.2 1611.38,7693.62 1611.38,7644.53 U6.7@1611.46,7644.46
NetC15_2: C15.2 U6.10@1604.57,7582.44 U6.10@1611.46,7575.55 | length 58.2
  Top Layer w10: C15.2 1611.38,7526.38 1611.38,7575.47 U6.10@1611.46,7575.55
NetC28_2: C28.2 U9.28
NetC34_2: C34.2 U14.28 | length 121.9
  Top Layer w10: U14.28 2607.01,7237.01 2615,7245 2645,7245 C34.2
NetC42_2: C42.2 U16.7@3392.57,6135.59 U16.7@3399.46,6128.7
NetC47_2: C47.2 U16.10@3330.55,6128.7 U16.10@3337.44,6135.59
NetC50_2: C50.2 U13.6
NetC52_1: C52.1 R35.1 U19.9 | length 106.9
  Top Layer w10: R35.1 4128.03,7550.59 4136.81,7559.37 C52.1 4179.73,7559.37 4186.73,7566.37 U19.9
NetC53_1: C53.1 R36.2 R38.2 R40.2 R44.2 R45.2 R53.2 U19.8 | length 376
  Top Layer w10: C53.1 R38.2 3975.63,7675.23 3981.49,7669.37 4030.81,7669.37 4040.81,7679.37 R53.2 4095.63,7649.37 4114.53,7630.47 U19.8 ; R40.2 R36.2
NetC54_2: C54.2 RS1.1 U11.1 U19.28
NetC55_2: C55.2 L1.1 U11.14
NetC56_1: C56.1 R48.2 | length 47.1
  Top Layer w10: C56.1 4495.63,7754.37 R48.2
NetC57_1: C57.1 R48.1 U19.24 | length 169.5
  Top Layer w10: U19.24 4358.82,7768.27 4399.92,7809.37 C57.1 R48.1
NetC58_2: C58.2 U19.14 | length 57.1
  Top Layer w10: U19.14 4285.16,7569.34 4295.13,7559.37 C58.2
NetJ6_1: J6.1 R10.2 U1.3 | length 210.3
  Top Layer w10: U1.3@3660,7958.86 J6.1@3660,8044.88 ; U1.3@3673.39,7957.28 U1.3@3680.98,7964.88 ; J6.1 3686.89,8045 3721.89,8080 R10.2
  Top Layer w15: U1.3@3660,7958.86 U1.3 U1.3@3673.39,7957.28
NetJ7_3: J7.3 U5.3 | length 100.1
  Top Layer w7: J7.3 2953.11,8001.89 U5.3
NetJ7_4: J7.4 U5.2 | length 100.1
  Top Layer w7: U5.2 2966.89,8001.89 J7.4
NetJ7_5: J7.5 U4.7 | length 95.1
  Top Layer w7: J7.5 3153.11,8001.89 U4.7@3153.11,7967.72
NetJ7_6: J7.6 U4.6 | length 95.1
  Top Layer w7: U4.6@3166.89,7967.72 3166.89,8001.89 J7.6
NetJ7_7: J7.7 U3.3 | length 95.1
  Top Layer w7: J7.7 3353.11,8001.89 U3.3@3353.11,7967.72
NetJ7_8: J7.8 U3.2 | length 111
  Top Layer w6: U3.2 U3.2@3367.33,7963.16 ; J7.8@3399.22,8019.11 J7.8@3410,8029.88
  Top Layer w7: U3.2@3366.89,7967.72 3366.89,8001.89 J7.8
NetL1_2: L1.2 Q2.5 Q2.6 Q2.7 Q2.8 R46.2
NetQ1_2: Q1.2 U19.26
NetQ1_4: Q1.4 U19.25
NetQ1_6,5: Q1.5 Q1.6 Q1.7 Q1.8 RS1.2 U19.27
NetQ2_2: Q2.2 U19.21
NetQ2_4: Q2.4 U19.19
NetR2_1: R2.1 R3.1 U10.3
NetR2_2: R2.2 U8.10 | length 248.7
  Top Layer w10: U8.10 3150.63,7764.37 3185,7730 3185,7575
NetR4_1: R4.1 R7.2 U12.3
NetR5_1: R5.1 R6.1 U12.1
NetR9_1: R9.1 R11.1 U1.1 | length 118.4
  Top Layer w10: U1.1 3707.94,7882.48 3714.94,7889.48 R9.1 ; R9.1@3715,7884.88 R11.1@3715,7944.88
  Top Layer w15: U1.1 U1.1@3662.78,7883.68
NetR12_2: R12.2 R30.2 U1.5 U4.3 | length 260.1
  Top Layer w7: U4.3@3166.89,7919.57 3166.89,7903.11 v1(3175,7895)
  Top Layer w10: U1.5 3558.94,7920 3594.14,7920 3600,7914.14 3600,7731.1
  Top Layer w15: R12.2 R12.2@3590,7835.5
NetR13_1: R13.1 R14.1 U6.1@1668.54,7575.55 U6.1@1675.43,7582.44 | length 138.9
  Top Layer w10: U6.1@1675.43,7582.44 1697.56,7582.44 1710,7570 1710,7525 R13.1 1710,7515 R14.1
NetR14_2: R14.2 R15.1 U6.2 | length 116.2
  Top Layer w10: U6.2 1675.51,7601.22 1746.22,7601.22 R15.1 R14.2
NetR16_1: R16.1 U6.9 | length 53.2
  Top Layer w10: R16.1 1565.5,7585 1572.5,7592 1572.5,7595.28 1578.36,7601.14 U6.9
NetR17_1: R17.1 U15.2 | length 90.2
  Top Layer w10: U15.2@1792.78,6745.16 U15.2 1819.53,6744.53 1830,6755 1830,6795 R17.1
NetR18_1: R18.1 U9.22
NetR19_1: R19.1 U9.26
NetR20_1: R20.1 U17.2 | length 68.6
  Top Layer w10: U17.2 1542.69,6476.47 1570.67,6476.47 v1(1570.88,6476.68) ; R20.1 v1(1835,6890)
NetR21_1: R21.1 U14.22 | length 91.5
  Top Layer w10: U14.22 2800.83,7210.71 2800.83,7235.83 2820,7255 2820,7273.82 2828.78,7282.6 R21.1
NetR22_1: R22.1 U14.26 | length 132.1
  Top Layer w10: U14.26 2670,7230 2685,7245 2730,7245 2740,7255 R22.1
NetR23_1: R23.1 R26.1 U16.1@3330.55,6071.62 U16.1@3337.44,6064.73
NetR24_2: R24.2 R25.1 U15.9 | length 99.2
  Top Layer w10: R24.2 R25.1 1557.6,6845 1605.22,6845 U15.9
NetR26_2: R26.2 R27.1 U16.2
NetR28_1: R28.1 U16.9
NetR29_2: R29.2 U13.10
NetR30_1: R30.1 U21.1
NetR31_2: R31.2 R33.1 U17.9 | length 96.5
  Top Layer w10: U17.9 1729.27,6375.65 1778.25,6375.65 R31.2 R33.1
NetR36_1: R36.1 R37.2 U19.31 | length 141.9
  Top Layer w10: U19.31 4206.42,7863.08 4195.63,7873.87 R37.2 R36.1
NetR38_1: R38.1 R39.2 U19.1 | length 182.9
  Top Layer w10: R38.1 R39.2 4151.34,7769.37 4152.44,7768.27 U19.1
NetR40_1: R40.1 R41.2 U19.32 | length 323.4
  Top Layer w10: R40.1 R41.2 4055.63,7929.37 4049.77,7923.51 4049.77,7870.23 4075.63,7844.37 4075.63,7840.23 4123.97,7791.89 U19.32
NetR42_2: R42.2 R43.2 U20.3
NetR43_1: R43.1 R44.1 U11.2
NetR45_1: R45.1 R47.2 R52.2
NetR46_1: R46.1 U19.20
NetR47_1: R47.1 R50.2 U20.2
NetR49_2: R49.2 U19.13 | length 56.9
  Top Layer w10: R49.2 4256.13,7559.37 4265.47,7568.71 U19.13
NetR50_1: R50.1 U13.8 U20.6
NetR51_2: R51.2 U11.5
NetR53_1: R53.1 U19.2 | length 75.4
  Top Layer w10: R53.1 4101.13,7729.37 4120.34,7748.58 U19.2
NetR54_2: R54.2 U13.9 U16.4@3392.57,6064.73 U16.4@3399.46,6071.62
NetR55_2: R55.2 U13.11 U19.16 | length 56.5
  Top Layer w10: U19.16 4324.53,7596.18 4338.13,7582.58 4338.13,7571.37 4345.13,7564.37 R55.2
NetU7_3: U7.3 U8.5 | length 301.1
  Top Layer w10: U7.3 2856,7803.62 2874.62,7785 2965,7785 3005,7745 3005,7691.49 2999.14,7685.63 U8.5
NetU9_10: U9.10 U9.13 U9.14 U9.15 U9.16 U9.17 U9.18 U9.19 U9.42
  other v2: 3357.87,6632.52 3402.13,6632.52 3357.87,6662.05 3402.13,6662.05 3357.87,6691.57 3402.13,6691.57 3357.87,6721.1 3402.13,6721.1 3357.87,6750.63 3402.13,6750.63 3328.35,6780.16 3357.87,6780.16 3402.13,6780.16 3431.65,6780.16
NetU9_30: U9.30 U21.3
NetU11_9: U11.9 U11.11 U12.2
NetU13_3: U13.3 U19.5
NetU13_4: U13.4 U19.29
NetU13_5: U13.5 U19.30
NetU14_10: U14.10 U14.13 U14.14 U14.15 U14.16 U14.17 U14.18 U14.19 U14.42
  other v2: 2770.39,6958.35 2622.76,6987.87 2652.28,6987.87 2681.81,6987.87 2711.34,6987.87 2740.87,6987.87 2770.39,6987.87 2622.76,7032.13 2652.28,7032.13 2681.81,7032.13 2711.34,7032.13 2740.87,7032.13 2770.39,7032.13 2770.39,7061.65
NetU19_6: U19.6 U19.7 | length 19.7
  Top Layer w10: U19.7 U19.6
PGND: C11.1 C12.1 C13.1 C14.1 C15.1 C22.1 C23.1 C24.1 C25.1 C26.1 C27.1 C29.1 C30.1 C31.1 C32.1 C33.1 C35.1 C36.1 C37.1 C38.1 C39.1 C40.1 C41.1 C42.1 C43.1 C44.1 C45.1 C46.1 C47.1 C48.1 C49.1 J2.1 J3.1 R15.2 R16.2 R27.2 R28.2 U6.8 U9.20 U9.21 U9.31 U9.32 U9.33 U11.13 U14.20 U14.21 U14.31 U14.32 U14.33 U15.3 U15.10 U15.11 U15.15 U16.8 U17.3 U17.10 U17.11 U17.15 U18.2 | length 168.5
  Top Layer w10: 1530,7625 1530,7550.5 1555,7525.5 C15.1 ; R16.2 1565.5,7635 1572.5,7628 1572.5,7624.72 1578.36,7618.86 U6.8
  other v1: 2205,6940 2235,6940 2265,6940 2190,6960 2220,6960 2250,6960 1670,6970 1700,6970 1730,6970 1685,6990 1715,6990 1670,7010 1700,7010 1731.92,7013.6 2950,7045 2980,7045 3010,7045 2965,7065 2995,7065 2950,7085 2980,7085 3010,7085 2965,7105 2995,7105 2570,7110 2600,7110 2630,7110 2660,7110 2690,7110 2720,7110 2750,7110 2780,7110 2950,7125 2980,7125 3010,7125 2555,7130 2585,7130 2615,7130 2645,7130 2675,7130 2705,7130 2735,7130 2765,7130 2795,7130 2965,7145 2995,7145 2310,7165 2350,7165 2390,7165 2430,7165 2950,7165 2980,7165 3010,7165 2330,7180 2370,7180 2410,7180 2310,7195 2350,7195 2390,7195 2430,7195 2330,7210 2370,7210 2410,7210 2310,7225 2350,7225 2390,7225 2430,7225 1540,7665 1570,7665
SCLK: U5.7 U8.7 U13.14 | length 516.9
  Top Layer w7: U5.7 2966.89,7823.11 2975,7815 2980,7815 3040,7755 3040,7735 3070,7705 U8.7@3090,7705
  Top Layer w10: U8.7 3105.66,7705.16 3154.84,7705.16 v1(3155,7705)
  Bottom Layer w10: v1(3155,7705) 3200,7705 3295,7800
VIN: C11.2 J1.1 R13.2 U6.5@1649.84,7610
  other v1: 1665,7385 1695,7385 1725,7385 1680,7405 1710,7405 1740,7405 1670,7410 1650,7580 1650,7600 1650,7620 1649.84,7639.84
pads on no net: U1.6 U6.1@1668.05,7575.55 U6.1@1675.43,7582.93 U6.3 U6.4 U6.5@1649.84,7585.2 U6.5@1649.84,7634.8 U6.6@1630.16,7585.2 U6.6@1630.16,7634.8 U6.7@1604.57,7637.07 U6.7@1611.95,7644.45 U6.10@1604.57,7582.93 U6.10@1611.95,7575.55 U9.4 U9.5 U9.7 U9.8 U9.9 U9.24 U9.25 U10.1 U10.5 U10.8 U11.8 U11.12 U13.17 U14.4 U14.5 U14.7 U14.8 U14.9 U14.24 U14.25 U14.30 U15.4 U15.5 U15.6 U15.13 U16.1@3330.55,6072.11 U16.1@3337.93,6064.73 U16.3 U16.4@3392.07,6064.73 U16.4@3399.45,6072.11 U16.5@3340.2,6090.32 U16.5@3389.8,6090.32 U16.6@3340.2,6110.01 U16.6@3389.8,6110.01 U16.7@3392.07,6135.6 U16.7@3399.45,6128.22 U16.10@3330.55,6128.22 U16.10@3337.93,6135.6 U17.4 U17.5 U17.6 U17.13 U18.4 U19.4 U19.10 U19.11 U19.15 U20.1 U20.5 U20.8
copper on no net:
  other v4: 3278.19,7698.19 3301.81,7698.19 3278.19,7721.81 3301.81,7721.81

## Polygon pours and split planes (outlines as drawn)
3V3 on Layer 2 "NONET_L04_P-001" (solid, pour order 3): 3485,7855 2655,7855 2655,7735 3485,7735
"3V3 IO" on Layer 2 "NONET_L04_P-001" (solid, pour order 2): 3485,8095 2655,8095 2655,7875 3465,7875 3485,7895
AGND on Top Layer "AGND_L01_P063" (solid, pour order 63): 3525,8055 3545,8075 3545,8080 3540,8085 3455,8085 3450,8080 3450,8075 3470,8055
AGND on Top Layer "AGND_L01_P062" (solid, pour order 62): 3745,7920 3785,7920 3785,8045 3740,8045 3740,8025 3720,8005 3720,7985 3745,7960
AGND on Top Layer "AGND_L01_P061" (solid, pour order 61): 3690,7905 3600,7905 3600,7965 3630,7965 3630,7930 3690,7930
AGND on Top Layer "AGND_L01_P060" (solid, pour order 60): 3400,7935 3400,7905 3430,7905 3430,7850 3485,7850 3525,7810 3560,7810 3560,7860 3525,7860 3525,7925 3465,7925 3465,7935
5V on Top Layer "5V_L01_P059" (solid, pour order 59): 3475,8040 3475,7935 3520,7935 3530,7945 3585,7945 3585,8040
PGND on Top Layer "PGND_L01_P058" (solid, pour order 58): 2430,6975 2430,6925 2195,6925 2170,6950 2170,7245 2525,7245 2525,7150 2820,7150 2820,7225 3070,7225 3070,6905 2895,6905 2895,7130 2830,7130 2830,7095 2260,7095 2260,6975
AGND on Top Layer "AGND_L01_P057" (solid, pour order 57): 2530,7160 2810,7160 2810,7290 2855,7290 2855,7375 2560,7375 2560,7310 2530,7280
AGND on Top Layer "AGND_L01_P056" (solid, pour order 56): 2535,6880 2535,6785 2775,6785 2775,6880
5V on Top Layer "5V_L01_P055" (solid, pour order 55): 2585,7090 2585,6935 2440,6935 2440,6985 2270,6985 2270,7090
12V on Top Layer "12V_L01_P054" (solid, pour order 54): 2815,6865 2815,6795 3125,6795 3125,6895 2845,6895 2845,6865
NetU14_10 on Top Layer "NETU14_10_L01_P053" (solid, pour order 53): 2785,6795 2785,6945 2595,6945 2595,7080 2840,7080 2840,7150 2885,7150 2885,6905 2840,6905 2840,6870 2810,6870 2810,6795
12V on Top Layer "12V_L01_P052" (solid, pour order 52): 2775,6930 2775,6890 2525,6890 2525,6785 2345,6785 2270,6860 2270,6915 2440,6915 2440,6930
"3V3 IO" on Top Layer "3V3_IO_L01_P051" (solid, pour order 51): 3400,7985 3400,7945 3465,7945 3465,7985
3V3 on Top Layer "3V3_L01_P050" (solid, pour order 50): 3145,7830 3105,7830 3105,7900 3145,7900
3V3 on Top Layer "3V3_L01_P049" (solid, pour order 49): 2975,7830 3015,7830 3015,7900 2975,7900
"3V3 IO" on Top Layer "3V3_IO_L01_P048" (solid, pour order 48): 3005,7990 3030,7990 3050,8010 3070,8010 3080,8000 3115,8000 3115,7950 3080,7950 3070,7940 3050,7940 3040,7950 3005,7950
5V_EXT on Top Layer "5V_EXT_L01_P047" (solid, pour order 47): 1755,6865 1810,6865 1810,6900 1820,6910 1900,6910 2300,6510 2525,6510 2590,6575 2590,6675 2515,6750 2325,6750 1955,7120 1640,7120 1590,7070 1590,6865 1645,6865 1645,7035 1755,7035
PGND on Top Layer "PGND_L01_P043" (solid, pour order 43): 1655,6855 1630,6855 1630,6830 1590,6830 1590,6785 1630,6785 1630,6730 1655,6730 1655,6630 1645,6620 1620,6620 1590,6590 1590,6460 1525,6460 1525,6440 1565,6440 1565,6370 1590,6370 1590,6275 1665,6275 1665,6355 1680,6370 1705,6370 1705,6390 1745,6390 1745,6435 1705,6435 1705,6490 1680,6490 1680,6595 1690,6605 1720,6605 1745,6630 1745,6730 1770,6730 1770,6760 1810,6760 1810,6780 1770,6780 1770,6855 1745,6855 1745,7025 1655,7025
5V3_EXT on Top Layer "5V3_EXT_L01_P046" (solid, pour order 46): 1580,6360 1580,6265 1675,6265 1675,6355 1680,6360 1740,6360 1740,6275 2800,6275 3000,6075 3000,5980 2940,5920 2830,5920 2640,6110 1765,6110 1695,6180 1545,6180 1525,6200 1525,6360
12V on Top Layer "12V_L01_P045" (solid, pour order 45): 1645,6720 1525,6720 1525,6500 1580,6500 1580,6595 1615,6630 1640,6630 1645,6635
12V on Top Layer "12V_L01_P044" (solid, pour order 44): 1690,6500 1690,6590 1695,6595 1725,6595 1755,6625 1755,6720 1810,6720 1810,6500
VIN on Top Layer "VIN_L01_P042" (solid, pour order 42): 1655,7570 1655,7560 1675,7540 1675,7420 1835,7420 1835,7565 2365,8095 2505,8095 2545,8055 2545,7330 2470,7255 1775,7255 1630,7400 1630,7545 1645,7560 1645,7570
PGND on Top Layer "PGND_L01_P041" (solid, pour order 41): 1700,7635 1785,7635 1785,7490 1710,7490 1710,7430 1825,7430 1825,7825 1700,7825
PGND on Top Layer "PGND_L01_P040" (solid, pour order 40): 1525,7725 1580,7725 1580,7615 1525,7615
12V on Top Layer "12V_L01_P039" (solid, pour order 39): 1635,7650 1635,7655 1660,7680 1670,7680 1670,7825 1525,7825 1525,7735 1625,7735 1625,7650

## Silkscreen, mask and mechanical layers (free items; w line width, h text height)
Board Shape:
  the board outline again, w10

## Dimensions
1633.86,7972.44 to 1633.86,6043.31 on Mechanical 1
3917.32,7972.44 to 1633.86,7957.44 on Mechanical 1
4842.52,7992.13 to 1496.06,7992.13 on Mechanical 1
1614.17,8110.24 to 1614.17,5905.51 on Mechanical 1

## Text inside footprints (layer, text, board x,y; h text height)
U7: Top Overlay "*" at 2693.5,7923.5 h50; Mechanical 13 "*" at 2743.5,7898.5 h50
U8: Top Overlay "*" at 2912,7772.37 h50; Mechanical 13 "*" at 2961.5,7733 h50
U10: Top Overlay "*" at 4049.64,6199.03 h50 r180; Mechanical 13 "*" at 3996,6244.5 h50 r180
U20: Top Overlay "*" at 3350.36,7430.97 h50; Mechanical 13 "*" at 3404,7385.5 h50